# EAGLE board pcb_board (EAGLE 9.7.0)
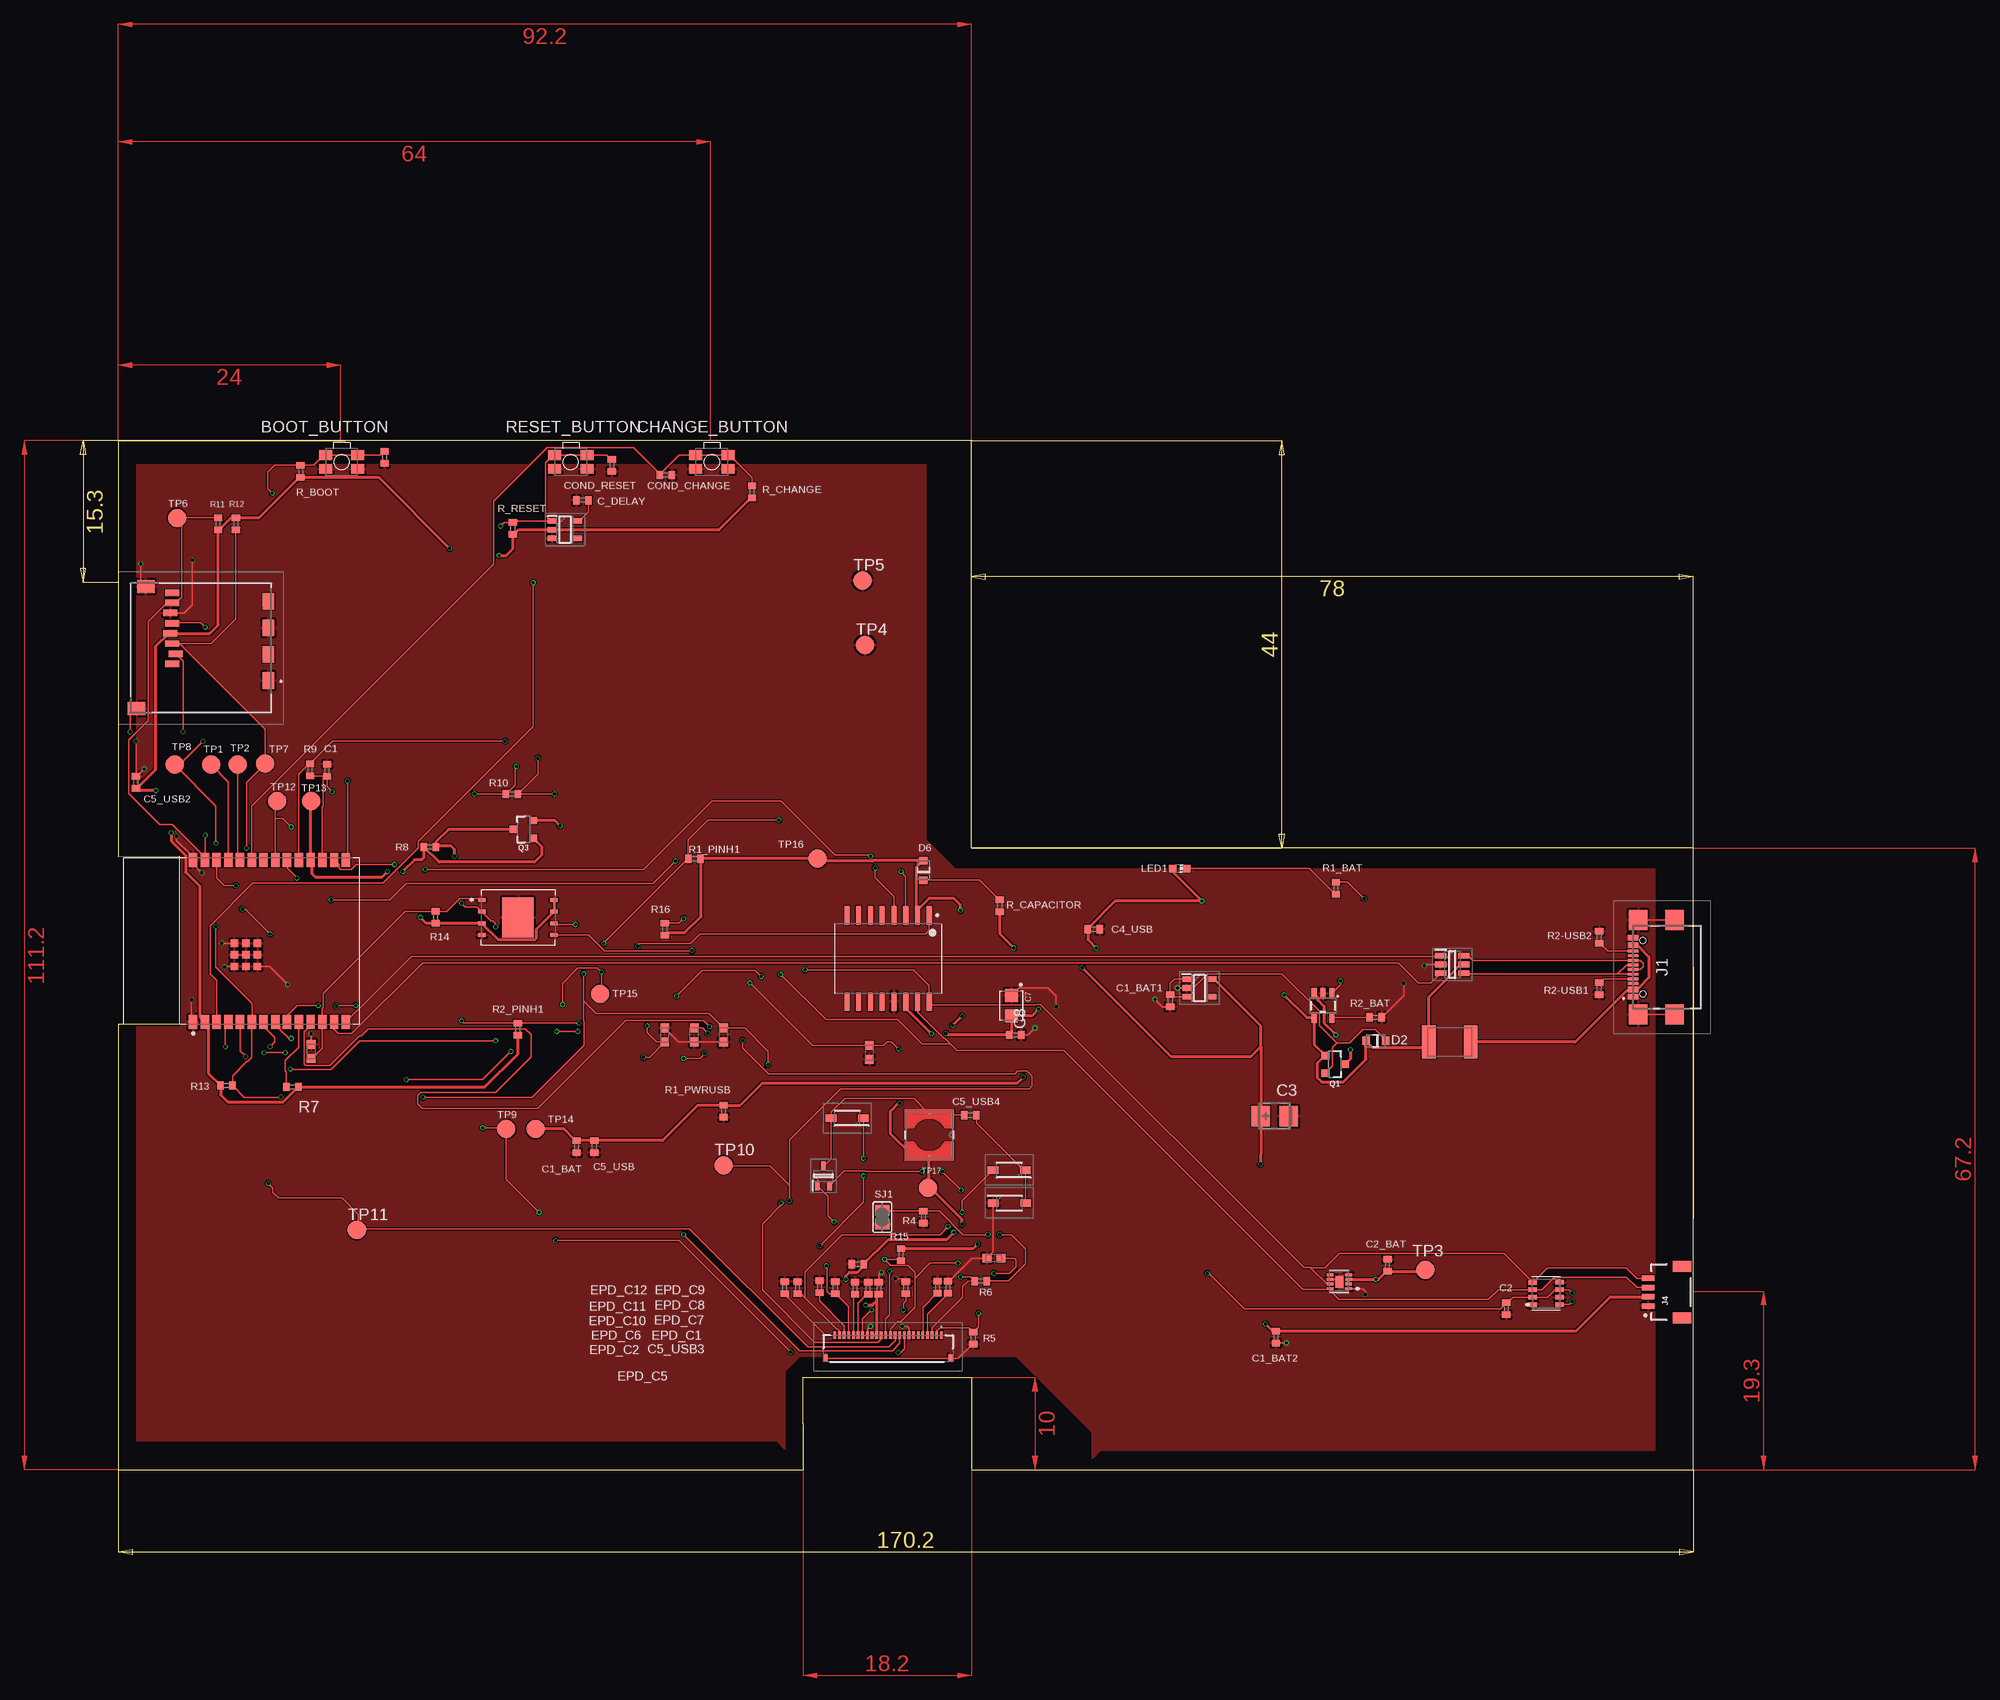
[diagram p0: board, top side]
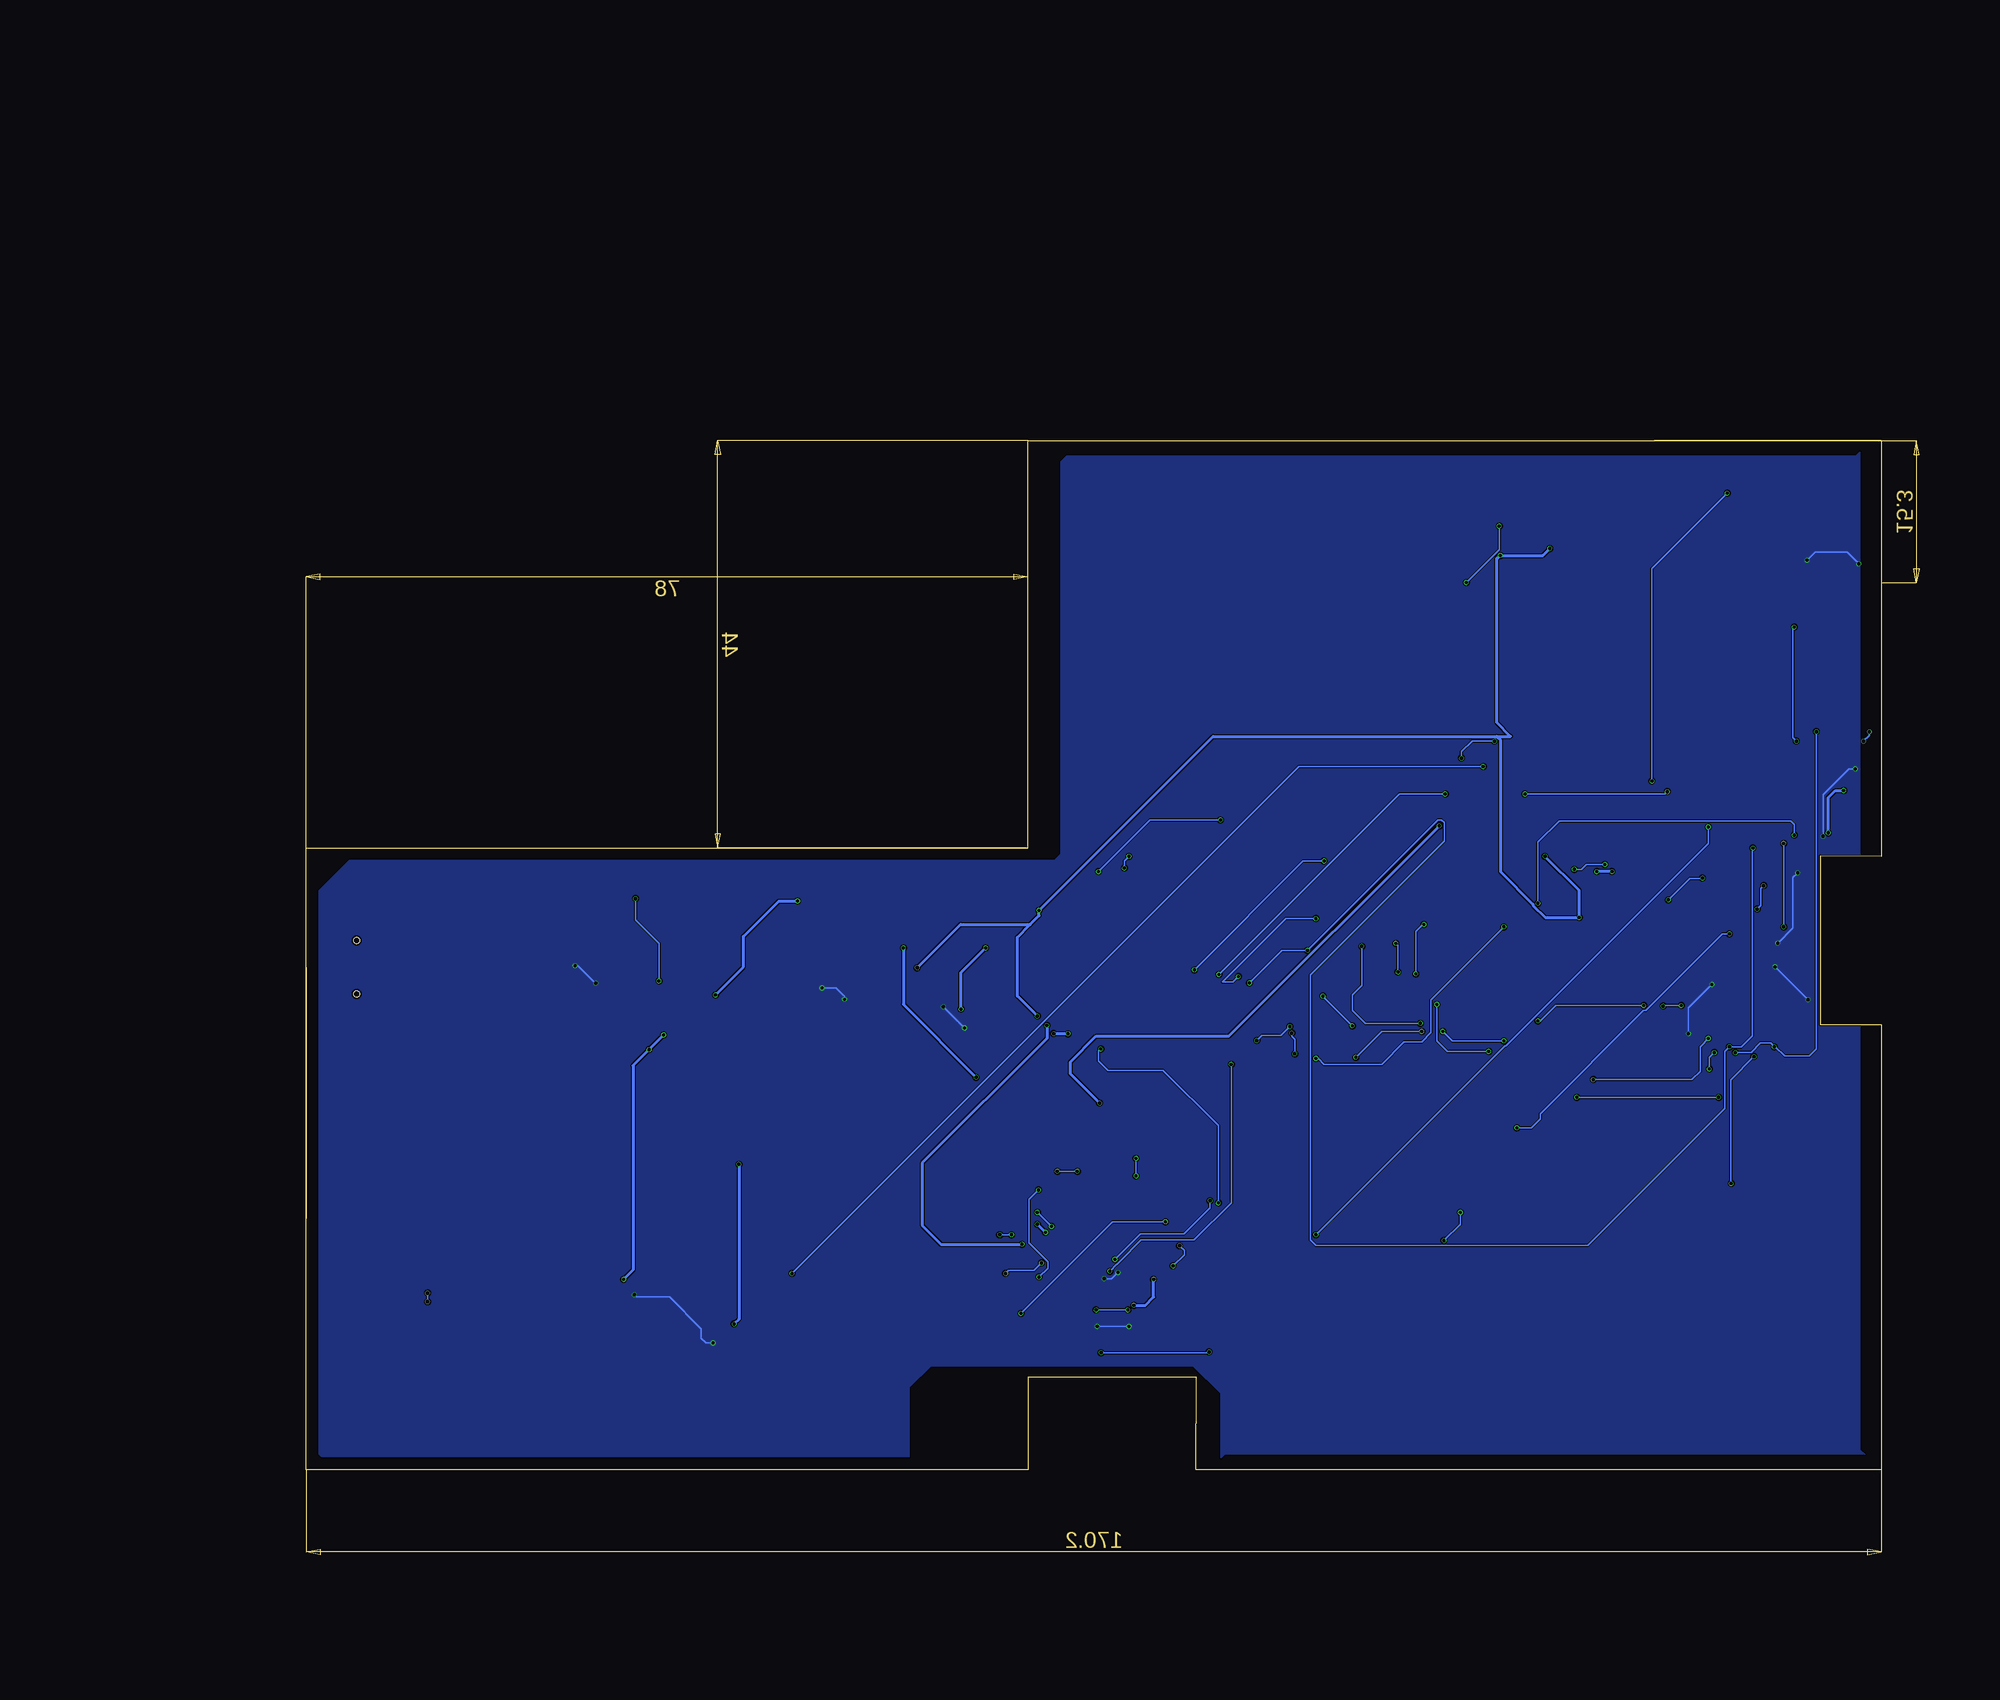
[diagram p1: board, bottom side, seen from below]

Size 170.2 x 111.2 mm. Coordinates in mm from the lower left corner, seen from the top.
Outline: 0,0 74.04,0 74,10 92.2,10 92.2,0 170.2,0 170.2,67.2 92.2,67.2 92.2,111.2 0,111.2 0,66.29 6.59,66.31 6.59,48.15 0,48.13 0,0
Copper layers (1*16): Top 0.035mm / dielectric 1.6mm / Bottom 0.035mm
Design rules "jlcpcb-2layers.dru *": minimum track width 5mil, minimum drill 0.3mm, track to track 5mil, track to pad 5mil, pad to pad 5mil, via to via 5mil, smd to smd 5mil, copper to edge 0.2mm, drill to drill 6mil, minimum pad ring 10mil, minimum via ring 3mil, stop-mask expansion 4mil, vias tented up to drill 0mil, thermal gap 10mil

## Footprints (pad centres in the part's own frame; a part is rotated, then mirrored left to right if it is on the bottom)
MYBUTTON = smd 1.4 x 1.05: 1 1.75,0.75; 2 -1.75,0.75; 3 -1.75,-0.75; 4 1.75,-0.75
ESP32_WROVER_EAGLE-LTSPICE_C0402 = smd 0.7 x 0.9: 1 -0.65,0; 2 0.65,0
RCL_CT3528 = smd 2 x 2.2: + -1.5,0; - 1.5,0
CAPCP3225X100N = smd 1.4 x 1.4: 1 -1.1,0; 2 1.1,0
SOT95P280X145-6N = smd 1.2 x 0.6: 1 -1.25,0.95; 2 -1.25,0; 3 -1.25,-0.95; 4 1.25,-0.95; 5 1.25,0; 6 1.25,0.95
ESP32_WROVER_AVX---SD0805S020S1R0_AVX_SD0805S020S1R0_0 = smd 0.8 x 0.9: 1 -1.05,0; 2 1.05,0
SOD3716X135N = smd 1.15 x 0.8: 1 -1.75,0; 2 1.75,0
DIOC1608X36N = smd 0.97 x 0.94: 1 -0.75,0; 2 0.75,0
SOT95P280X120-5N = smd 0.9 x 0.6: 1 -1.4,0.95; 2 -1.4,0; 3 -1.4,-0.95; 4 1.4,-0.95; 5 1.4,0.95
SOT95P280X125-5N = smd 0.9 x 0.6: 1 -1.4,0.95; 2 -1.4,0; 3 -1.4,-0.95; 4 1.4,-0.95; 5 1.4,0.95
SAMACSYS_PARTS_USB4110GFA = smd 0.3 x 1.15: A1 -3.35,3.678; A4 -2.55,3.678; A5 -1.25,3.678; A6 -0.25,3.678; A7 0.25,3.678; A8 1.25,3.678; A9 2.55,3.678; A12 3.35,3.678; B1 3.05,3.678; B4 2.25,3.678; B5 1.75,3.678; B6 0.75,3.678; B7 -0.75,3.678; B8 -1.75,3.678; B9 -2.25,3.678; B12 -3.05,3.678 | smd 2.18 x 2: MP1 -5.11,-0.827; MP2 5.11,-0.827; MP3 -5.11,3.103; MP4 5.11,3.103 | hole 0.65: -2.89,2.603; 2.89,2.603
112ATAARR03ATTEND = smd 1.8 x 1.2: G1 10.6,10.4; G2 4.9,10.4; S1 7.75,10.4; S2 2.05,10.4 | smd 1.4 x 1.9: G3 13.6,-3.85; G4 0.45,-2.85 | smd 0.7 x 1.5: P1 8.8,0; P2 7.7,0.4; P3 6.6,0; P4 5.5,-0.2; P5 4.4,0; P6 3.3,-0.2; P7 2.2,0; P8 1.1,0
FH34SRJ24S05SH99 = smd 0.3 x 0.8: 1 5.75,1.45; 2 5.25,1.45; 3 4.75,1.45; 4 4.25,1.45; 5 3.75,1.45; 6 3.25,1.45; 7 2.75,1.45; 8 2.25,1.45; 9 1.75,1.45; 10 1.25,1.45; 11 0.75,1.45; 12 0.25,1.45; 13 -0.25,1.45; 14 -0.75,1.45; 15 -1.25,1.45; 16 -1.75,1.45; 17 -2.25,1.45; 18 -2.75,1.45; 19 -3.25,1.45; 20 -3.75,1.45; 21 -4.25,1.45; 22 -4.75,1.45; 23 -5.25,1.45; 24 -5.75,1.45 | smd 0.4 x 0.8: MP1 6.75,-1.05; MP2 -6.75,-1.05
JST04_1MM_RA = smd 0.6 x 1.35: 1 -1.5,0; 2 -0.5,0; 3 0.5,0; 4 1.5,0 | smd 1.2 x 2: NC1 2.8,-3.675; NC2 -2.8,-3.675
IND_4828-WE-TPC_WRE = smd 0.127 x 0.127: 1 -2.286,0; 2 2.286,0
ADAFRUIT_CHIP-LED0603 = smd 0.8 x 0.8: A 0,-0.75; C 0,0.75
ESP32C6_VARISTOR_CT/CN1812 = smd 1.5 x 3.6: 1 -2.25,0; 2 2.25,0
ESP32_WROVER_SPARKFUN-DISCRETESEMI_SOT23-3 = smd 0.8 x 0.9: 1 -0.95,-1; 2 0.95,-1; 3 0,1.1
SOT65P210X110-3N = smd 1.05 x 0.5: 1 -1.05,0.65; 2 -1.05,-0.65; 3 1.05,0
ESP32_WROVER_EAGLE-LTSPICE_R0402 = smd 0.7 x 0.9: 1 -0.65,0; 2 0.65,0
SJ = smd 1.168 x 1.6: 1 -0.762,0; 2 0.762,0
TP20R = smd 2 x 2: TP 0,0
ESP32_WROVER_SPARKFUN-IC-POWER_SOT23-5 = smd 0.55 x 1.2: 1 -0.95,-1.3; 2 0,-1.3; 3 0.95,-1.3; 4 0.95,1.3; 5 -0.95,1.3
XCVR_ESP32-C6-WROOM-1-N8 = smd 1.5 x 0.9: 1 -8.75,5.26; 2 -8.75,3.99; 3 -8.75,2.72; 4 -8.75,1.45; 5 -8.75,0.18; 6 -8.75,-1.09; 7 -8.75,-2.36; 8 -8.75,-3.63; 9 -8.75,-4.9; 10 -8.75,-6.17; 11 -8.75,-7.44; 12 -8.75,-8.71; 13 -8.75,-9.98; 14 -8.75,-11.25; 15 8.75,-11.25; 16 8.75,-9.98; 17 8.75,-8.71; 18 8.75,-7.44; 19 8.75,-6.17; 20 8.75,-4.9; 21 8.75,-3.63; 22 8.75,-2.36; 23 8.75,-1.09; 24 8.75,0.18; 25 8.75,1.45; 26 8.75,2.72; 27 8.75,3.99; 28 8.75,5.26 | smd 0.8 x 0.8: 29_1 -2.755,0.79; 29_2 -1.505,0.79; 29_3 -0.255,0.79; 29_4 -2.755,-0.46; 29_5 -1.505,-0.46; 29_6 -0.255,-0.46; 29_7 -2.755,-1.71; 29_8 -1.505,-1.71; 29_9 -0.255,-1.71
ESP32_WROVER_BME680_PSON80P300X300X100-8N = smd 1.016 x 0.5: 1 1.458,1.2; 2 1.458,0.4; 3 1.458,-0.4; 4 1.458,-1.2; 5 -1.458,-1.22; 6 -1.458,-0.4; 7 -1.458,0.4; 8 -1.458,1.2
SON50P200X200X80-9N = smd 0.76 x 0.27: 1 -0.985,0.75; 2 -0.985,0.25; 3 -0.985,-0.25; 4 -0.985,-0.75; 5 0.985,-0.75; 6 0.985,-0.25; 7 0.985,0.25; 8 0.985,0.75 | smd 0.9 x 1.3: 9 0,0
SOIC127P1032X265-16N = smd 2.05 x 0.59: 1 -4.655,4.445; 2 -4.655,3.175; 3 -4.655,1.905; 4 -4.655,0.635; 5 -4.655,-0.635; 6 -4.655,-1.905; 7 -4.655,-3.175; 8 -4.655,-4.445; 9 4.655,-4.445; 10 4.655,-3.175; 11 4.655,-1.905; 12 4.655,-0.635; 13 4.655,0.635; 14 4.655,1.905; 15 4.655,3.175; 16 4.655,4.445
SON127P600X800X80-9N = smd 0.94 x 0.44: 1 -3.895,1.905; 2 -3.895,0.635; 3 -3.895,-0.635; 4 -3.895,-1.905; 5 3.895,-1.905; 6 3.895,-0.635; 7 3.895,0.635; 8 3.895,1.905 | smd 3.4 x 4.3: 9 0,0

## Placement (x,y rotation side)
BOOT_BUTTON  BUTTON_CUSYOMV1  [MYBUTTON]  24.13,108.91 180 top
C1  100nF  [ESP32_WROVER_EAGLE-LTSPICE_C0402]  22.57,75.6 90 top
C1_BAT  4.7uF  [ESP32_WROVER_EAGLE-LTSPICE_C0402]  49.53,34.91 270 top
C1_BAT1  4.7uF  [ESP32_WROVER_EAGLE-LTSPICE_C0402]  113.67,50.67 270 top
C1_BAT2  4.7uF  [ESP32_WROVER_EAGLE-LTSPICE_C0402]  125.09,14.35 270 top
C2  100nF  [ESP32_WROVER_EAGLE-LTSPICE_C0402]  149.99,17.4 270 top
C2_BAT  4.7uF  [ESP32_WROVER_EAGLE-LTSPICE_C0402]  137.16,22.1 90 top
C3  100uF TANT  [RCL_CT3528]  124.97,38.23 0 top
C4_USB  100nF  [ESP32_WROVER_EAGLE-LTSPICE_C0402]  105.41,58.42 0 top
C5_USB  4.7uF  [ESP32_WROVER_EAGLE-LTSPICE_C0402]  51.44,34.92 270 top
C5_USB2  100nF  [ESP32_WROVER_EAGLE-LTSPICE_C0402]  1.91,74.3 90 top
C5_USB3  4.7uF  [ESP32_WROVER_EAGLE-LTSPICE_C0402]  82.19,19.65 90 top
C5_USB4  4.7uF  [ESP32_WROVER_EAGLE-LTSPICE_C0402]  92.08,38.33 180 top
C7  CPH3225A  [CAPCP3225X100N]  96.52,50.16 270 top
C8  100nF  [ESP32_WROVER_EAGLE-LTSPICE_C0402]  96.9,46.99 0 top
C_DELAY  100nF  [ESP32_WROVER_EAGLE-LTSPICE_C0402]  50.16,104.78 180 top
CHANGE_BUTTON  CHANGE_BUTTON  [MYBUTTON]  64.14,108.91 180 top
COND_BOOT  100nF  [ESP32_WROVER_EAGLE-LTSPICE_C0402]  28.79,109.39 270 top
COND_CHANGE  100nF  [ESP32_WROVER_EAGLE-LTSPICE_C0402]  59.18,107.5 0 top
COND_RESET  1uF  [ESP32_WROVER_EAGLE-LTSPICE_C0402]  53.34,108.55 270 top
D1  USBLC6-2SC6Y  [SOT95P280X145-6N]  144.15,54.61 0 top
D2  SD0805S020S1R0  [ESP32_WROVER_AVX---SD0805S020S1R0_AVX_SD0805S020S1R0_0]  135.89,46.35 180 top
D3  MBR0530  [SOD3716X135N]  96.27,32.38 180 top
D4  MBR0530  [SOD3716X135N]  96.29,28.83 0 top
D5  MBR0530  [SOD3716X135N]  78.77,38 180 top
D6  ESP32_WROVER_AVX---SD0805S020S1R0_AVX_SD0805S020S1R0_0_0AVX_SD0805S020S1R0_0_0  [ESP32_WROVER_AVX---SD0805S020S1R0_AVX_SD0805S020S1R0_0]  87,64.77 90 top
D7  PGB1010603MR  [DIOC1608X36N]  62.23,46.99 90 top
D8  PGB1010603MR  [DIOC1608X36N]  81.15,45.09 90 top
D9  PGB1010603MR  [DIOC1608X36N]  65.41,46.99 90 top
D10  PGB1010603MR  [DIOC1608X36N]  20.83,45.21 270 top
D11  PGB1010603MR  [DIOC1608X36N]  94.61,22.86 0 top
D12  PGB1010603MR  [DIOC1608X36N]  59.05,46.99 270 top
EPD_C1  1uF/50V  [ESP32_WROVER_EAGLE-LTSPICE_C0402]  89.66,19.72 90 top
EPD_C2  1uF/50V  [ESP32_WROVER_EAGLE-LTSPICE_C0402]  88.53,19.72 90 top
EPD_C5  0.1uF/50V  [ESP32_WROVER_EAGLE-LTSPICE_C0402]  79.89,22.23 180 top
EPD_C6  1uF/50V  [ESP32_WROVER_EAGLE-LTSPICE_C0402]  85.09,19.68 90 top
EPD_C7  1uF/50V  [ESP32_WROVER_EAGLE-LTSPICE_C0402]  81.03,19.63 90 top
EPD_C8  1uF/50V  [ESP32_WROVER_EAGLE-LTSPICE_C0402]  79.6,19.63 90 top
EPD_C9  1uF/50V  [ESP32_WROVER_EAGLE-LTSPICE_C0402]  77.47,19.68 90 top
EPD_C10  1uF/50V  [ESP32_WROVER_EAGLE-LTSPICE_C0402]  75.77,19.81 90 top
EPD_C11  1uF/50V  [ESP32_WROVER_EAGLE-LTSPICE_C0402]  73.41,19.68 90 top
EPD_C12  1uF/50V  [ESP32_WROVER_EAGLE-LTSPICE_C0402]  72.01,19.68 90 top
IC1  XC6220A331MR-G  [SOT95P280X120-5N]  116.84,52.07 0 top
IC3  BD5229G-TR  [SOT95P280X125-5N]  48.26,101.6 0 top
J1  SAMACSYS_PARTS_USB4110-GF-A  [SAMACSYS_PARTS_USB4110GFA]  167.36,54.31 90 top
J2  112A-TAAR-R03_ATTEND  [112ATAARR03ATTEND]  5.82,95.89 270 top
J3  FH34SRJ-24S-0.5SH_99_  [FH34SRJ24S05SH99]  83.19,13.1 0 top
J4  QWIIC_RIGHT_ANGLE  [JST04_1MM_RA]  165.32,19.2 90 top
L1  68uH  [IND_4828-WE-TPC_WRE]  87.63,36.2 270 top
LED1  [ADAFRUIT_CHIP-LED0603]  114.71,64.97 270 top
PFMF.050.1  ESP32C6_VARISTORCN1812  [ESP32C6_VARISTOR_CT/CN1812]  143.89,46.23 180 top
Q1  20V/4.2A/52mΩ/1.4W  [ESP32_WROVER_SPARKFUN-DISCRETESEMI_SOT23-3]  131.44,43.81 270 top
Q2  SI1308EDL-T1-GE3  [SOT65P210X110-3N]  76.2,31.75 90 top
Q3  20V/4.2A/52mΩ/1.4W  [ESP32_WROVER_SPARKFUN-DISCRETESEMI_SOT23-3]  43.81,69.22 90 top
R1_BAT  200  [ESP32_WROVER_EAGLE-LTSPICE_R0402]  131.57,62.87 90 top
R1_PINH1  10K  [ESP32_WROVER_EAGLE-LTSPICE_R0402]  62.23,66.04 0 top
R1_PWRUSB  100k  [ESP32_WROVER_EAGLE-LTSPICE_R0402]  65.41,38.73 90 top
R2-USB1  5k1  [ESP32_WROVER_EAGLE-LTSPICE_R0402]  160.02,51.99 90 top
R2-USB2  5k1  [ESP32_WROVER_EAGLE-LTSPICE_R0402]  160.02,57.53 90 top
R2_BAT  2k  [ESP32_WROVER_EAGLE-LTSPICE_R0402]  135.89,48.9 180 top
R2_PINH1  10K  [ESP32_WROVER_EAGLE-LTSPICE_R0402]  43.18,47.62 270 top
R4  2.2  [ESP32_WROVER_EAGLE-LTSPICE_R0402]  87,27.3 270 top
R5  10K  [ESP32_WROVER_EAGLE-LTSPICE_R0402]  92.38,14.22 90 top
R6  0.47  [ESP32_WROVER_EAGLE-LTSPICE_R0402]  93.19,20.4 180 top
R7  10k  [ESP32_WROVER_EAGLE-LTSPICE_R0402]  18.79,41.38 0 top
R8  10K  [ESP32_WROVER_EAGLE-LTSPICE_R0402]  33.66,67.31 0 top
R9  10K  [ESP32_WROVER_EAGLE-LTSPICE_R0402]  20.73,75.66 270 top
R10  10K  [ESP32_WROVER_EAGLE-LTSPICE_R0402]  42.55,73.03 180 top
R11  10K  [ESP32_WROVER_EAGLE-LTSPICE_R0402]  10.79,102.23 270 top
R12  10K  [ESP32_WROVER_EAGLE-LTSPICE_R0402]  12.7,102.23 90 top
R13  10K  [ESP32_WROVER_EAGLE-LTSPICE_R0402]  11.68,41.53 180 top
R14  10K  [ESP32_WROVER_EAGLE-LTSPICE_R0402]  34.29,59.69 270 top
R15  10K  [ESP32_WROVER_EAGLE-LTSPICE_R0402]  84.58,23.24 90 top
R16  10K  [ESP32_WROVER_EAGLE-LTSPICE_R0402]  59.05,58.42 270 top
R_BOOT  10K  [ESP32_WROVER_EAGLE-LTSPICE_R0402]  19.68,107.91 270 top
R_CAPACITOR  15  [ESP32_WROVER_EAGLE-LTSPICE_R0402]  95.25,60.96 90 top
R_CHANGE  10K  [ESP32_WROVER_EAGLE-LTSPICE_R0402]  68.48,105.7 270 top
R_RESET  10K  [ESP32_WROVER_EAGLE-LTSPICE_R0402]  42.64,101.73 270 top
RESET_BUTTON  BUTTON_CUSYOMV1  [MYBUTTON]  48.9,108.91 180 top
SJ1  [SJ]  82.55,27.3 90 top
TP1  TPTP20R  [TP20R]  10.03,76.2 0 top
TP2  TPTP20R  [TP20R]  12.92,76.2 0 top
TP3  TPTP20R  [TP20R]  141.22,21.59 0 top
TP4  TPTP20R  [TP20R]  80.69,89.14 0 top
TP5  TPTP20R  [TP20R]  80.42,96.1 0 top
TP6  TPTP20R  [TP20R]  6.35,102.87 0 top
TP7  TPTP20R  [TP20R]  15.84,76.34 0 top
TP8  TPTP20R  [TP20R]  6.1,76.2 0 top
TP9  TPTP20R  [TP20R]  41.91,36.83 0 top
TP10  TPTP20R  [TP20R]  65.41,32.91 0 top
TP11  TPTP20R  [TP20R]  25.78,25.91 0 top
TP12  TPTP20R  [TP20R]  17.14,72.26 0 top
TP13  TPTP20R  [TP20R]  20.85,72.26 0 top
TP14  TPTP20R  [TP20R]  45.09,36.83 0 top
TP15  TPTP20R  [TP20R]  52.07,51.44 0 top
TP16  TPTP20R  [TP20R]  75.56,66.04 0 top
TP17  TPTP20R  [TP20R]  87.5,30.48 0 top
U1  MCP73831  [ESP32_WROVER_SPARKFUN-IC-POWER_SOT23-5]  130.18,50.16 180 top
U2  ESP32-C6-WROOM-1-N8  [XCVR_ESP32-C6-WROOM-1-N8]  13.34,57.15 90 top
U3  BME688  [ESP32_WROVER_BME680_PSON80P300X300X100-8N]  154.31,19.05 180 top
U4  MAX17048G+T10  [SON50P200X200X80-9N]  131.95,20.32 180 top
U5  DS3231SN#  [SOIC127P1032X265-16N]  83.19,55.24 270 top
U6  W25Q512JVEIQ  [SON127P600X800X80-9N]  43.18,59.69 0 top

## Library data of the parts
BOOT_BUTTON CHANGE_BUTTON IC1 J4 LED1 PFMF.050.1 RESET_BUTTON SJ1 TP1-TP17 = DeskAssistant_v19_v1
C1 C1_BAT C1_BAT1 C1_BAT2 C2 C2_BAT C4_USB C5_USB C5_USB2-C5_USB4 C8 C_DELAY COND_BOOT COND_CHANGE COND_RESET EPD_C1 EPD_C2 EPD_C5-EPD_C12 = DeskAssistant_v19_v1; SPICEMODEL: NONE; SPICEPREFIX: C
C3 = DeskAssistant_v19_v1; SPICEPREFIX: C
C7 = DeskAssistant_v19_v1; AVAILABILITY: Not in stock; CHECK_PRICES: https://www.snapeda.com/parts/CPH3225A/Seiko+Instruments/view-part/?ref=eda; DESCRIPTION: 11 mF (EDLC) Supercapacitor 3.3 V 1210 (3225 Metric) - -; MF: Seiko Instruments; MP: CPH3225A; PACKAGE: 1210 Seiko; PRICE: None; PURCHASE-URL: https://www.snapeda.com/api/url_track_click_mouser/?unipart_id=562593&manufacturer=Seiko Instruments&part_name=CPH3225A&search_term=None; SNAPEDA_LINK: https://www.snapeda.com/parts/CPH3225A/Seiko+Instruments/view-part/?ref=snap
D1 = DeskAssistant_v19_v1; AVAILABILITY: In Stock; CHECK_PRICES: https://www.snapeda.com/parts/USBLC6-2SC6Y/STMicroelectronics/view-part/?ref=eda; DESCRIPTION: 17V Clamp 5A (8/20µs) Ipp Tvs Diode Surface Mount SOT-23-6; MF: STMicroelectronics; MP: USBLC6-2SC6Y; PACKAGE: SOT-23-6 STMicroelectronics; PRICE: None; SNAPEDA_LINK: https://www.snapeda.com/parts/USBLC6-2SC6Y/STMicroelectronics/view-part/?ref=snap
D2 D6 = DeskAssistant_v19_v1; CENTROID_NOT_SPECIFIED: No; DATASHEET: http://datasheets.avx.com/schottky.pdf; DIGIKEY_DESCRIPTION: DIODE SCHOTTKY 20V 1A 0805; DIGIKEY_PART_NUMBER: 478-7800-1-ND; LEAD_FREE: yes; MF: AVX; MOUSER_PART_NUMBER: 581-SD0805S020S1R0; PACKAGE: 0805 (2012 metric); PREFIX: D; ROHS: yes; TEMPERATURE_RANGE_HIGH: +125°C; TEMPERATURE_RANGE_LOW: -55°C
D3-D5 = DeskAssistant_v19_v1; AVAILABILITY: In Stock; CHECK_PRICES: https://www.snapeda.com/parts/MBR0530/Onsemi/view-part/?ref=eda; DESCRIPTION: Diode Schottky 30 V 500mA Surface Mount SOD-123; MF: ON Semiconductor; MP: MBR0530; PACKAGE: SOD-123-2 ON Semiconductor; PRICE: None; PURCHASE-URL: https://www.snapeda.com/api/url_track_click_mouser/?unipart_id=179458&manufacturer=ON Semiconductor&part_name=MBR0530&search_term=None; SNAPEDA_LINK: https://www.snapeda.com/parts/MBR0530/Onsemi/view-part/?ref=snap
D7-D12 = DeskAssistant_v19_v1; AVAILABILITY: In Stock; CHECK_PRICES: https://www.snapeda.com/parts/PGB1010603MR/Littelfuse/view-part/?ref=eda; DESCRIPTION: 150V (Typ) Clamp - Ipp Tvs Diode Surface Mount 0603 (1608 Metric); MF: Littelfuse Inc.; MP: PGB1010603MR; PACKAGE: 0603 Littelfuse Inc.; PRICE: None; PURCHASE-URL: https://www.snapeda.com/api/url_track_click_mouser/?unipart_id=5659453&manufacturer=Littelfuse Inc.&part_name=PGB1010603MR&search_term=None; SNAPEDA_LINK: https://www.snapeda.com/parts/PGB1010603MR/Littelfuse/view-part/?ref=snap
IC3 = DeskAssistant_v19_v1; DESCRIPTION: Voltage Detector with Adjustable Delay Time: CMOS processes are utilized to develop high precision, low current consumption CMOS reset ICs that allow arbitrary setting of the delay time. The extensive lineup includes both Nch Open Drain and CMOS output types in a wide range of detection voltages (from 2.3V to 6.0V, in 0.1V steps), enabling selection of the ideal solution based on customer requirements. In addition, the entire series is of course both lead-free and RoHS-compliant.; HEIGHT: 1.25mm; MANUFACTURER_NAME: ROHM Semiconductor; MANUFACTURER_PART_NUMBER: BD5229G-TR; MOUSER_PART_NUMBER: 755-BD5229G-TR; MOUSER_PRICE-STOCK: https://www.mouser.co.uk/ProductDetail/ROHM-Semiconductor/BD5229G-TR?qs=4kLU8WoGk0vvnhrrYwdszw%3D%3D
J1 = DeskAssistant_v19_v1; DESCRIPTION: CONN USB 2.0 TYPE-C R/A SMT; HEIGHT: 3.26mm; MANUFACTURER_NAME: GCT (GLOBAL CONNECTOR TECHNOLOGY); MANUFACTURER_PART_NUMBER: USB4110-GF-A; MOUSER_PART_NUMBER: 640-USB4110-GF-A; MOUSER_PRICE-STOCK: https://www.mouser.co.uk/ProductDetail/GCT/USB4110-GF-A?qs=KUoIvG%2F9IlYiZvIXQjyJeA%3D%3D
J2 = DeskAssistant_v19_v1; DESCRIPTION: Micro SD Card Socket, Push-Push Type, Top Mount, SMT, H=1.83mm, 10u; HEIGHT: 1.9mm; MANUFACTURER_NAME: ATTEND; MANUFACTURER_PART_NUMBER: 112A-TAAR-R03 ATTEND
J3 = DeskAssistant_v19_v1; DESCRIPTION: 24 Position FFC, FPC Connector Contacts, Top and Bottom 0.020" (0.50mm) Surface Mount, Right Angle; HEIGHT: 1.1mm; MANUFACTURER_NAME: Hirose; MANUFACTURER_PART_NUMBER: FH34SRJ-24S-0.5SH(99); MOUSER_PART_NUMBER: 798-FH34SRJ24S05SH99; MOUSER_PRICE-STOCK: https://www.mouser.co.uk/ProductDetail/Hirose-Connector/FH34SRJ-24S-0.5SH99?qs=vcbW%252B4%252BSTIpKBl5ap9J8Fw%3D%3D
L1 = DeskAssistant_v19_v1; COPYRIGHT: Copyright (C) 2024 Ultra Librarian. All rights reserved.; MANUFACTURER_PART_NUMBER: 744043680; MFR_NAME: Wurth Electronics
Q1 Q3 = DeskAssistant_v19_v1; PROD_ID: TRAN-14388
Q2 = DeskAssistant_v19_v1; AVAILABILITY: In Stock; CHECK_PRICES: https://www.snapeda.com/parts/SI1308EDL-T1-GE3/Vishay+Siliconix/view-part/?ref=eda; DESCRIPTION: Si1308EDL-T1-GE3 N-channel MOSFET Transistor, 1.5 A, 30 V, 3-Pin SC-70 | Siliconix / Vishay SI1308EDL-T1-GE3; MF: Vishay Siliconix; MP: SI1308EDL-T1-GE3; PACKAGE: SOT-323 Vishay Semiconductor; PRICE: None; PURCHASE-URL: https://www.snapeda.com/api/url_track_click_mouser/?unipart_id=274603&manufacturer=Vishay Siliconix&part_name=SI1308EDL-T1-GE3&search_term=None; SNAPEDA_LINK: https://www.snapeda.com/parts/SI1308EDL-T1-GE3/Vishay+Siliconix/view-part/?ref=snap
R1_BAT R1_PINH1 R1_PWRUSB R2-USB1 R2-USB2 R2_BAT R2_PINH1 R4-R16 R_BOOT R_CAPACITOR R_CHANGE R_RESET = DeskAssistant_v19_v1; SPICEMODEL: NONE; SPICEPREFIX: R
U1 = DeskAssistant_v19_v1; PROD_ID: IC-09995
U2 = DeskAssistant_v19_v1; AVAILABILITY: In Stock; CHECK_PRICES: https://www.snapeda.com/parts/ESP32-C6-WROOM-1-N8/Espressif+Systems/view-part/?ref=eda; DESCRIPTION: Multiprotocol Modules ESP32-C6 module, Wi-Fi 6 in 2.4 GHz band, Bluetooth 5, Zigbee 3.0 and Thread. ESP34-WROOM Compatible - ENGINEERING SAMPLE; MF: Espressif Systems; MP: ESP32-C6-WROOM-1-N8; PACKAGE: None; PRICE: None; SNAPEDA_LINK: https://www.snapeda.com/parts/ESP32-C6-WROOM-1-N8/Espressif+Systems/view-part/?ref=snap
U3 = DeskAssistant_v19_v1; AVAILABILITY: Unavailable; DESCRIPTION: Integrated Environmental Unit; MF: Bosch Sensortec; MP: BME680; PACKAGE: LGA-8 Bosch Tools; PRICE: None
U4 = DeskAssistant_v19_v1; AVAILABILITY: In Stock; CHECK_PRICES: https://www.snapeda.com/parts/MAX17048G+T10/Analog+Devices/view-part/?ref=eda; DESCRIPTION: 3µA 1-Cell/2-Cell Fuel Gauge with ModelGauge; MF: Analog Devices; MP: MAX17048G+T10; PACKAGE: TDFN-8 Maxim; PRICE: None; PURCHASE-URL: https://www.snapeda.com/api/url_track_click_mouser/?unipart_id=329239&manufacturer=Analog Devices&part_name=MAX17048G+T10&search_term=None; SNAPEDA_LINK: https://www.snapeda.com/parts/MAX17048G+T10/Analog+Devices/view-part/?ref=snap
U5 = DeskAssistant_v19_v1; AVAILABILITY: In Stock; CHECK_PRICES: https://www.snapeda.com/parts/DS3231SN%23/Analog+Devices/view-part/?ref=eda; DESCRIPTION: Extremely Accurate I²C-Integrated RTC/TCXO/Crystal; MF: Analog Devices; MP: DS3231SN#; PACKAGE: SOIC-16 Maxim; PRICE: None; PURCHASE-URL: https://www.snapeda.com/api/url_track_click_mouser/?unipart_id=99048&manufacturer=Analog Devices&part_name=DS3231SN#&search_term=None; SNAPEDA_LINK: https://www.snapeda.com/parts/DS3231SN%23/Analog+Devices/view-part/?ref=snap
U6 = DeskAssistant_v19_v1; AVAILABILITY: In Stock; CHECK_PRICES: https://www.snapeda.com/parts/W25Q512JVEIQ/Winbond+Electronics/view-part/?ref=eda; DESCRIPTION: FLASH - NOR Memory IC 512Mb (64M x 8) SPI - Quad I/O 133 MHz 8-WSON (8x6); MF: Winbond Electronics; MP: W25Q512JVEIQ; PACKAGE: Package; PRICE: None; SNAPEDA_LINK: https://www.snapeda.com/parts/W25Q512JVEIQ/Winbond+Electronics/view-part/?ref=snap

## Nets
3V3 [power]: C1_BAT2.1 C3.+ C5_USB2.1 D6.2 IC1.5 IC3.2 J2.P4 J4.2 Q3.3 R1_PINH1.2 R2_PINH1.2 R7.2 R8.2 R11.2 R12.2 R13.2 R14.2 R15.2 R16.2 R_BOOT.2 R_CHANGE.2 R_RESET.2 TP16.TP U2.2 U5.2 U6.3 U6.7 U6.8
32KHZ: R2_PINH1.1 U2.9 U5.1
DN: D1.4 J1.A7 J1.B7
DP: D1.6 J1.A6 J1.B6
EPD_3V3 [power]: C5_USB3.1 EPD_C5.1 J3.15 J3.16 L1.2 Q3.2 TP17.TP
EPD_3V3_C [power]: Q3.1 R8.1 TP13.TP U2.18
EPD_BUSY: J3.9 TP9.TP U2.26
EPD_CS: D11.2 J3.12 R15.1 TP10.TP U2.11
EPD_DC: J3.11 TP11.TP U2.5
EPD_RST: J3.10 TP12.TP U2.21
FLASH_CS: D10.2 R14.1 U2.12 U6.1
GDR: J3.2 Q2.1 R5.2
GND: BOOT_BUTTON.1 BOOT_BUTTON.2 C1.2 C1_BAT1.2 C1_BAT2.2 C1_BAT.2 C2.2 C2_BAT.2 C3.- C4_USB.2 C5_USB2.2 C5_USB3.2 C5_USB.2 C7.1 C8.2 C_DELAY.2 CHANGE_BUTTON.1 CHANGE_BUTTON.2 COND_BOOT.2 COND_CHANGE.2 COND_RESET.2 D1.2 D4.1 D7.1 D8.1 D9.1 D10.1 D11.1 D12.1 EPD_C1.2 EPD_C2.2 EPD_C5.2 EPD_C6.2 EPD_C7.2 EPD_C8.2 EPD_C9.2 EPD_C10.2 EPD_C11.2 EPD_C12.2 IC1.2 IC3.3 J1.A1 J1.A12 J1.B1 J1.B12 J1.MP1 J1.MP2 J1.MP3 J1.MP4 J2.G1 J2.G2 J2.G3 J2.G4 J2.P6 J3.8 J3.17 J3.MP1 J3.MP2 J4.1 R1_PWRUSB.1 R2-USB1.1 R2-USB2.2 R2_BAT.1 R4.2 R5.1 RESET_BUTTON.1 RESET_BUTTON.2 SJ1.1 TP4.TP TP5.TP U1.2 U2.1 U2.28 U2.29_1 U2.29_2 U2.29_3 U2.29_4 U2.29_5 U2.29_6 U2.29_7 U2.29_8 U2.29_9 U3.1 U3.5 U3.7 U4.1 U4.4 U4.6 U4.9 U5.13 U6.4 U6.9
GPIO8: R7.1 U2.10
I2C_PW: C1.1 C2.1 R9.2 R10.2 U2.17 U3.2 U3.6 U3.8
INT_RTC: R1_PINH1.1 TP15.TP U2.8 U5.3
IO/BOOT: BOOT_BUTTON.3 BOOT_BUTTON.4 COND_BOOT.1 R_BOOT.1 U2.15
IO/CHANGE: CHANGE_BUTTON.3 CHANGE_BUTTON.4 COND_CHANGE.1 R_CHANGE.1 U2.23
MISO: D7.2 J2.P7 R11.1 TP6.TP U2.27 U6.2
MOSI: D8.2 J2.P3 J3.14 R12.1 TP7.TP U2.7 U6.5
N$1: C1_BAT1.1 D2.1 IC1.1 IC1.3 Q1.2
N$2: EPD_C12.1 J3.24
N$3: R1_BAT.2 U1.1
N$4: J1.B5 R2-USB2.1
N$5: J1.A5 R2-USB1.2
N$6: C5_USB4.1 D3.1 D4.2
N$7: LED1.C R1_BAT.1
N$8: R2_BAT.2 U1.5
N$9: D6.1 R_CAPACITOR.2
N$10: EPD_C10.1 J3.22
N$11: C_DELAY.1 IC3.5
N$12: EPD_C7.1 J3.19
N$13: EPD_C8.1 J3.20
N$14: EPD_C6.1 J3.18
N$23: EPD_C2.1 J3.5
N$24: EPD_C1.1 J3.4
PREVGH: D5.1 EPD_C9.1 J3.21
PREVGL: D3.2 EPD_C11.1 J3.23
RESE: J3.3 Q2.2 R6.2
RESE': R4.1 R6.1 SJ1.2
RESET: COND_RESET.1 IC3.1 R_RESET.1 RESET_BUTTON.3 RESET_BUTTON.4 U2.3
RTC_RST: U2.16 U5.4
RX: TP2.TP U2.24
SCK: D9.2 J2.P5 J3.13 R13.1 TP8.TP U2.6 U6.6
SCL: J4.4 U2.20 U3.4 U4.7 U5.16
SDA: J4.3 R9.1 R10.1 U2.19 U3.3 U4.8 U5.15
SRC: C5_USB4.2 D5.2 L1.1 Q2.3
SS_SD: D12.2 J2.P2 R16.1 U2.4
TX: TP1.TP U2.25
USB_D+: D1.1 U2.14
USB_D-: D1.3 U2.13
VBAT [power]: C2_BAT.1 Q1.3 TP3.TP U1.3 U4.2 U4.3
VBUS [power]: C1_BAT.1 C4_USB.1 C5_USB.1 D1.5 D2.2 LED1.A PFMF.050.1.2 Q1.1 R1_PWRUSB.2 TP14.TP U1.4
VRTC [power]: C7.2 C8.1 R_CAPACITOR.1 U5.14
VUSB [power]: J1.A4 J1.A9 J1.B4 J1.B9 PFMF.050.1.1

## Tracks (layer width: path | path; a pad name or v marks a point on that pad's centre or on a via)
3V3  (via drill 0.35)
  Top 0.3: R_CHANGE.2 68.38,105.05 64.93,101.6 IC3.2 43.26,101.6 42.74,101.08 R_RESET.2 42.64,99.53 41.91,98.81 v41.15,98.81 | v35.81,99.57 28.12,107.26 R_BOOT.2 19.59,107.26 15.21,102.89 R12.2 12.2,102.89 10.89,101.58 R11.2 10.79,91.31 9.87,90.39 J2.P4 5.42,90.39 4.03,89 4.03,75.67 2,73.64 C5_USB2.1 2.14,73.41 v4.06,73.41 | IC1.5 118.39,53.02 123.47,47.94 123.47,45.74 | 123.47,45.74 C3.+ 123.47,34.06 123.44,34.04 v123.44,33.02 | v123.95,15.75 124.7,15 C1_BAT2.1 157.56,15 161.26,18.7 J4.2 | v104.17,54.25 104.19,54.25 113.82,44.63 122.35,44.63 123.47,45.74 | v91.01,60.45 91.01,61.04 90.3,61.75 87.61,61.75 86.36,60.5 U5.2 86.27,59.99 86.27,65.14 86.94,65.82 D6.2 81.55,65.82 81.5,65.77 75.84,65.77 TP16.TP 62.99,66.04 | 62.99,66.04 R1_PINH1.2 | v91.19,49.02 v90.17,48.01 | v92.84,24.38 92.34,23.89 R15.2 | R16.2 59.32,58.04 61.21,58.04 62.99,59.82 62.99,66.04 | Q3.3 35.69,69.22 34.3,67.83 34.3,67.44 | 34.3,67.44 R8.2 | v32.64,59.69 33.29,59.04 R14.2 34.3,59.05 U6.3 41.08,57.26 44.99,57.26 45.16,57.42 45.16,58.41 U6.7 U6.8 | v36.32,66.29 36.32,67.06 35.94,67.44 34.3,67.44 | R2_PINH1.2 43.18,44.95 39.61,41.38 R7.2 17.79,39.73 11.83,39.73 11.03,40.53 R13.2 9.73,42.84 9.73,48.02 U2.2 8.8,48.94 8.8,63.07 7.27,64.6 7.27,66.41 5.71,67.97 v5.71,68.83
  Bottom 0.3: v35.81,99.57 36.58,98.81 v41.15,98.81 41.39,98.57 41.5,98.57 41.52,98.55 41.52,80.73 40.05,79.27 41.56,79.27 | v123.44,33.02 123.44,16.26 v123.95,15.75 | v104.17,54.25 99.47,58.95 92.02,58.95 91.98,58.91 | 91.98,58.91 93.35,57.54 93.35,51.19 v91.19,49.02 | 91.98,58.91 91.01,59.88 v91.01,60.45 72.19,79.27 41.56,79.27 | v5.71,68.83 5.71,72.64 4.95,73.41 v4.06,73.41 | v90.17,48.01 90.17,46.61 103.63,33.15 103.63,26.42 101.6,24.38 v92.84,24.38 | v36.32,66.29 32.64,62.61 v32.64,59.69 36.31,59.69 37.61,60.99 37.61,61.12 41.15,64.65 41.15,78.85 41.56,79.27
32KHZ  (via drill 0.35)
  Top 0.15: U5.1 87.63,58.29 87.25,57.91 62.87,57.91 61.85,56.9 56.26,56.9 56.13,56.77 v56.13,56.58 | v49.78,48.26 49.77,48.27 43.31,48.27 43.19,48.4 R2_PINH1.1 37.32,48.27 v37.08,48.51 | U2.9 18.23,49.1 19.3,50.16 v21.6,50.16 | v23.56,50.11 23.62,50.16 v25.65,50.16
  Bottom 0.15: v49.78,48.26 55.75,48.26 57.15,49.66 57.15,51.31 56.13,52.32 v56.13,56.58 | v21.6,50.16 23.62,50.16 v23.56,50.11 | v25.65,50.16 35.18,50.16 36.83,48.51 v37.08,48.51
DN
  Top 0.15: 162.01,53.55 162.81,53.55 163.58,53.55 J1.B7 | 162.01,53.55 145.5,53.55 D1.4 | J1.A7 163.01,54.55 162.01,53.55
DP
  Top 0.15: J1.A6 164.46,54.05 164.78,54.38 164.78,54.73 164.46,55.05 J1.B6 146.4,55.05 145.9,55.56 D1.6
EPD_3V3  (via drill 0.35)
  Top 0.3: C5_USB3.1 81.94,18.74 81.94,18.21 | 81.94,14.61 J3.15 | v78.61,20.57 78.61,20.95 78.99,21.34 79.88,21.34 80.54,22 EPD_C5.1 83.21,24.89 89.53,24.89 v90.3,25.65 | v91.19,26.54 91.19,27.05 87.76,30.48 TP17.TP 87.5,31.5 87.63,31.62 L1.2 85.85,33.91 83.44,36.32 83.44,38.73 84.33,39.62 v84.45,39.62 | v47.75,69.6 47.18,70.17 Q3.2 | J3.16 81.49,14.61 81.94,14.61 | 81.94,18.21 81.94,17.49 | 81.94,17.49 | 81.94,17.49 81.94,17.05 | 81.94,17.05 | 81.94,17.05 81.94,14.61 | v80.77,17.78 81.17,17.78 81.19,17.8 81.53,17.8 81.94,18.21
  Bottom 0.3: v80.77,17.78 79.5,17.78 78.61,18.67 v78.61,20.57 | v90.3,25.65 v91.19,26.54 | v84.45,39.62 87.63,42.8 87.63,44.07 84.84,46.86 70.48,46.86 v47.75,69.6
EPD_3V3_C  (via drill 0.35)
  Top 0.3: TP13.TP 20.77,72.18 U2.18 20.95,65.72 20.95,64.39 21.34,64.01 28.45,64.01 v29.08,64.64 | Q3.1 45.72,67.36 45.72,66.42 44.96,65.66 34.66,65.66 R8.1 33.01,66.15 32.77,65.91 32,65.91 v30.73,64.64
  Bottom 0.3: v29.08,64.64 v30.73,64.64
EPD_BUSY  (via drill 0.35)
  Top 0.15: v47.24,24.77 60.58,24.77 v72.62,12.73 | v45.47,27.81 41.91,31.37 TP9.TP 41.78,36.96 v39.37,36.96 | U2.26 10.62,63.93 11.43,63.12 v12.7,63.12 | v13.4,60.58 13.72,60.58 v16.38,57.91 | J3.9 84.94,13.05 84.53,12.65 v84.29,12.65
  Bottom 0.15: v47.24,24.77 45.47,26.54 v45.47,27.81 | v12.7,63.12 13.02,62.8 13.02,60.96 v13.4,60.58 | v39.37,36.96 37.77,36.96 36.83,37.9 36.83,38.48 25.67,49.64 25.43,49.64 17.16,57.91 v16.38,57.91 | v84.29,12.65 72.69,12.65 v72.62,12.73
EPD_CS  (via drill 0.35)
  Top 0.15: 86.11,20.7 86.11,21.34 85.36,22.08 83.45,22.08 v82.8,22.73 84.44,22.73 R15.1 | J3.12 83.44,15.24 84.22,16.02 84.58,16.02 86.11,17.55 86.11,20.7 | 86.11,20.7 87.74,22.34 v90.74,22.34 | TP10.TP 65.41,32.85 70.4,32.85 72.52,30.73 v72.52,29.08 72.52,35.66 78.04,41.18 98.45,41.18 98.72,41.45 98.72,42.57 98.18,43.11 97.19,43.11 96.88,42.8 70.29,42.8 67.48,45.61 v67.48,46.38 | v94.61,21.21 96.33,21.21 97.02,21.9 97.02,22.68 96.84,22.86 D11.2 | v63.9,47.89 63.25,48.54 54.79,48.54 45.3,39.05 32.84,39.05 32.37,39.53 32.37,40.48 32.67,40.79 40.77,40.79 44.58,44.6 44.58,47.02 43.96,47.64 27.01,47.64 26.25,46.88 26,46.88 22.82,43.7 20.24,43.7 20.08,43.86 20.08,47.33 20.77,48.02 U2.11
  Bottom 0.15: v82.8,22.73 80.03,25.5 75.33,25.5 72.52,28.32 v72.52,29.08 | v94.61,21.21 94.3,21.53 91.55,21.53 v90.74,22.34 | v63.9,47.89 64.85,46.94 66.92,46.94 v67.48,46.38
EPD_DC  (via drill 0.35)
  Top 0.15: J3.11 83.97,14.52 83.97,13.98 83.26,13.28 74.53,13.28 61.75,26.06 25.94,26.06 | 25.94,26.06 25.93,26.06 TP11.TP | U2.5 13.19,48.37 13.19,45.29 13.75,44.73 v13.75,44.64 | v16.22,30.94 16.68,30.48 16.68,29.98 17.3,29.36 24.16,29.36 25.94,27.58 25.94,26.06
  Bottom 0.15: v13.75,44.64 16.24,42.15 16.24,30.96 v16.22,30.94
EPD_RST  (via drill 0.35)
  Top 0.15: 16.96,70.36 16.96,72.08 TP12.TP | 16.96,70.36 U2.21 | v18.67,69.47 17.78,70.36 16.96,70.36 | J3.10 84.44,13.65 83.64,12.85 73.63,12.85 v61.09,25.4
  Bottom 0.15: v61.09,25.4 40.66,45.83 40.55,45.83 18.67,67.71 v18.67,69.47
FLASH_CS
  Top 0.15: D10.2 20.97,44.46 22.1,45.59 22.05,45.65 U2.12 22.05,49.86 22.13,49.95 22.13,51.47 31,60.34 R14.1 35.46,60.34 36.87,61.74 39.14,61.74 U6.1
GDR  (via drill 0.35)
  Top 0.15: v92.96,16.89 92.96,15.46 R5.2 91.92,15.33 88.77,15.33 88.44,14.99 J3.2 | v77.34,26.8 76.71,27.43 76.71,29.54 Q2.1
  Bottom 0.15: v92.96,16.89 83.06,26.8 v77.34,26.8
GND  (via drill 0.35)
  Top 0.15: 155.5,18.65 U3.7 | U4.6 131.7,20.57 U4.9 131.95,19.81 | C1_BAT2.2 125.11,13.72 v126.24,13.72 | R5.1 92.28,13.57 90.76,12.05 J3.MP1 J3.MP2 | D4.1 94.54,23.52 93.88,22.86 D11.1 92.24,22.86 89.76,20.37 EPD_C1.2 | J2.P6 7.12,92.59 8,93.47 v8,98.3 | v2.41,97.92 2.41,95.99 J2.G4 | v134.75,18.92 134.75,19.3 134.48,19.57 U4.1 | U2.29_2 U2.29_5 | 43.18,60.14 U6.9 | D12.1 59.05,47.73 60.54,46.24 D7.1 D9.1 | 65.31,38.09 R1_PWRUSB.1 | v20.83,47.12 D10.1 | v18.29,52.45 16.34,54.4 U2.29_7 | J1.MP4 J1.MP2 | J1.MP3 J1.MP1 | J1.B12 J1.A1 | J3.17 80.94,15.15 v81.28,15.49 | v84.71,15.49 85.22,15.49 85.44,15.28 J3.8 | C7.1 97.33,52.07 100.46,52.07 101.35,51.18 v101.35,50.04 | v99.06,47.75 98.3,46.99 C8.2 | v1.91,78.74 C5_USB2.2 2,74.94 v2.8,75.74 | v1.27,79.76 1.27,81.59 J2.G3 | U2.29_3 v11.18,56.9 | v9.02,64.52 8.07,65.46 U2.28 7.7,66.28 7.7,66.58 6.27,68.02 v6.27,68.47 | R2_BAT.1 138.91,51.27 v138.91,52.57 | v141.14,54.47 141.28,54.61 D1.2 | IC1.2 v114.46,52.07 | v112.03,50.84 112.85,50.02 C1_BAT1.2 | U2.1 7.89,48.59 v7.89,50.79 | v11.47,54.35 11.52,54.4 U2.29_1 | C5_USB3.2 82.19,21.04 v82.47,21.32 | v83.97,20.65 84.78,20.65 EPD_C6.2
  Bottom 0.15: v126.24,13.72 127,13.72 127.51,14.22 127.51,15.24 130.94,18.67 134.49,18.67 v134.75,18.92 | v8,98.3 7.11,99.19 3.68,99.19 v2.41,97.92 | v20.83,47.12 20.83,49.91 v18.29,52.45 | v84.71,15.49 v81.28,15.49 | v101.35,50.04 v99.06,47.75 | v1.91,78.74 1.27,79.38 v1.27,79.76 | v11.18,56.9 9.53,58.55 9.53,64.01 v9.02,64.52 | v138.91,52.57 140.81,54.47 v141.14,54.47 | v114.46,52.07 112.96,52.07 112.03,51.14 v112.03,50.84 | v7.89,50.79 11.45,54.35 v11.47,54.35 | v82.47,21.32 83.15,20.64 v83.97,20.64 v83.97,20.65 | v6.27,68.47 6.27,72.96 3.49,75.74 v2.8,75.74
  pour Top: 105.22,4.11 105.23,4.08 105.23,1.2 106.13,2.1 106.16,2.11 166.04,2.11 166.04,64.95 90.41,64.95 90.38,64.96 87.31,68.03 87.3,68.06 87.3,108.64 1.98,108.64 1.98,3.12 71.14,3.12 71.16,3.11 72.06,2.22 72.06,10.68 72.07,10.71 73.62,12.26 73.64,12.27 97.04,12.27 97.07,12.26
  pour Bottom: 1.78,1.65 70.99,1.65 71.37,1.27 71.37,8.26 74.29,11.18 102.74,11.18 105.03,8.89 105.03,1.4 168.53,1.4 168.78,1.65 168.78,62.61 165.48,65.91 89.28,65.91 88.64,66.55 88.64,108.97 88.01,109.6 2.67,109.6 2.29,109.98 2.29,2.16
GPIO8
  Top 0.15: U2.10 19.5,45.67 18.05,44.21 18.05,43.09 18.14,43 R7.1
I2C_PW  (via drill 0.35)
  Top 0.15: v117.7,21.21 117.86,21.21 121.68,17.39 149.33,17.39 C2.1 150.09,18.05 150.69,18.65 U3.2 154.46,18.65 155.25,19.45 U3.6 156.74,19.45 v157.1,19.09 | v43,76 42.87,75.87 42.87,74 R10.2 v38.48,73.03 | C1.1 22.34,74.95 22.13,74.73 22.13,71.73 22.05,71.65 U2.17 | C1.1 20.79,74.95 R9.2 | v23.11,73.28 22.57,73.82 C1.1 | U3.8 156.79,17.85 v157.1,18.16
  Bottom 0.15: v38.48,73.03 23.37,73.03 v23.11,73.28 | v157.1,18.16 v157.1,19.09 | v117.7,21.21 90.7,48.21 90.7,48.23 62.93,76 v43,76
INT_RTC  (via drill 0.35)
  Top 0.15: U5.3 85.09,64.14 v84.58,64.64 | v71.37,70.23 63.75,70.23 61.58,68.06 R1_PINH1.1 52.45,56.91 v52.45,56.89 | TP15.TP 52.2,51.56 v52.2,53.79 51.76,54.23 49.66,54.23 48.01,52.58 v48.01,50.29 | v31.11,42.16 39.37,42.16 v42.42,45.21 | U2.8 17.51,47.86 17.51,47.53 18.43,46.61 v18.67,46.61
  Bottom 0.15: v84.58,64.64 78.99,70.23 v71.37,70.23 | v52.45,56.89 52.2,56.64 v52.2,53.79 | v18.67,46.61 19.56,45.72 19.56,43.05 20.45,42.16 v31.11,42.16 | v42.42,45.21 46.86,45.21 48.01,46.35 v48.01,50.29
IO/BOOT  (via drill 0.35)
  Top 0.15: COND_BOOT.1 28.69,110.05 28.3,109.66 BOOT_BUTTON.3 BOOT_BUTTON.4 22.2,109.66 21.11,108.56 R_BOOT.1 16.87,108.56 16.13,107.82 16.13,106.05 v16.64,105.54 | v24.77,74.42 24.77,66.08 U2.15
  Bottom 0.15: v16.64,105.54 24.77,97.41 v24.77,74.42
IO/CHANGE
  Top 0.15: R_CHANGE.1 68.48,107.24 66.06,109.66 CHANGE_BUTTON.3 CHANGE_BUTTON.4 60.59,109.66 58.53,107.6 | 58.53,107.6 COND_CHANGE.1 | 58.53,107.6 55.67,110.46 46.33,110.46 40.58,104.71 40.58,97.86 14.43,71.71 U2.23
MISO  (via drill 0.35)
  Top 0.15: R11.1 6.37,102.89 TP6.TP 6.84,102.38 6.84,94.32 6.22,93.69 J2.P7 5.33,93.69 5.22,93.69 3.22,91.69 3.22,80.96 1.13,78.87 1.13,73.08 4.49,69.72 5.84,69.72 9.35,66.22 9.35,66.2 9.35,65.91 | U2.27 9.35,65.91 | v37.08,61.21 37.47,60.83 38.78,60.83 U6.2 40.3,59.31 40.51,59.31 40.77,59.05 v40.77,58.67 | v9.4,68.58 9.4,65.97 9.35,65.91 | v61.09,44.45 62.87,44.45 v63.37,44.96 | v63.7,47.19 63.15,47.74 D7.2
  Bottom 0.15: v37.08,61.21 37.08,67.82 34.8,70.1 9.78,70.1 9.4,69.72 v9.4,68.58 | v40.77,58.67 48.64,50.8 48.64,47.24 49.66,46.23 51.56,46.23 53.98,43.81 60.2,43.81 60.83,44.45 v61.09,44.45 | v63.37,44.96 63.37,46.48 63.7,46.81 v63.7,47.19
MOSI  (via drill 0.35)
  Top 0.15: R12.1 12.7,91.95 10.04,89.29 6.63,89.29 | 6.63,89.29 15.84,80.08 TP7.TP 15.84,76.3 13.84,74.3 v13.84,67.18 | 6.63,89.29 J2.P3 | v16.38,45.72 16.89,46.23 16.89,46.74 15.88,47.75 U2.7 | J3.14 82.42,14.54 82.42,14.1 82.11,13.78 75.25,13.78 69.6,19.43 69.6,26.58 71.63,28.62 v71.63,28.83 | v84.33,45.47 83.57,46.23 83.06,46.23 82.67,45.84 D8.2 75.04,45.84 v68.26,52.62 | v61.98,56.13 61.89,56.05 52.54,56.05 50.79,57.79 U6.5
  Bottom 0.15: v71.63,28.83 71.63,37.21 77.6,43.18 83.57,43.18 84.58,44.2 84.58,45.21 v84.33,45.47 | v68.26,52.62 64.74,56.13 v61.98,56.13 47.88,70.23 47.5,70.23 47.2,69.93 47.2,67.94 61.66,53.48 61.66,24.82 61.08,24.24 31.7,24.24 16.91,39.03 16.91,45.19 v16.38,45.72 15.11,45.72 13.93,46.9 13.93,67.1 v13.84,67.18
N$1
  Top 0.15: D2.1 136.94,46.34 136.75,46.15 136.64,46.15 136.86,46.37 136.86,46.53 135.82,47.58 134.48,47.58 133.03,46.13 131.69,46.13 | 131.69,46.13 129.78,48.04 129.78,49.58 125.76,53.6 117.67,53.6 116.17,52.09 116.17,51.63 115.66,51.13 115.14,51.13 IC1.3 114.16,51.12 113.96,51.32 C1_BAT1.1 113.67,52.55 114.13,53.02 114.98,53.02 | 131.69,46.13 131.22,45.66 131.21,45.66 131.21,43.63 Q1.2
  Top 0.152: 114.98,53.02 IC1.1
N$2
  Top 0.15: J3.24 76.41,14.55 72.01,18.95 EPD_C12.1
N$3  (via drill 0.35)
  Top 0.15: U1.1 132.08,52.42 v132.08,52.83 | v134.62,61.72 132.83,63.52 R1_BAT.2
  Bottom 0.15: v132.08,52.83 132.08,56.9 134.62,59.44 v134.62,61.72
N$4
  Top 0.15: J1.B5 160.95,56.05 160.12,56.88 R2-USB2.1
N$5
  Top 0.15: J1.A5 160.53,53.05 160.12,52.64 R2-USB1.2
N$6
  Top 0.15: C5_USB4.1 92.73,37.5 97.84,32.38 D3.1 98.02,28.85 D4.2
N$7
  Top 0.15: R1_BAT.1 131.47,62.22 128.71,64.97 LED1.C
N$8
  Top 0.15: R2_BAT.2 131.16,48.9 U1.5
N$9
  Top 0.15: R_CAPACITOR.2 95.15,61.61 93.04,63.72 D6.1
N$10
  Top 0.15: EPD_C10.1 75.77,18.24 78.44,15.57 J3.22
N$11
  Top 0.15: C_DELAY.1 50.81,103.56 49.81,102.55 IC3.5
N$12
  Top 0.15: EPD_C7.1 80.93,18.98 79.94,17.99 J3.19
N$13
  Top 0.15: EPD_C8.1 79.44,18.82 J3.20
N$14  (via drill 0.35)
  Top 0.15: J3.18 80.44,16.3 v81.41,17.27 | EPD_C6.1 85.11,19.02 85.11,18.24 84.84,17.97 v84.84,17.27
  Bottom 0.15: v81.41,17.27 v84.84,17.27
N$23
  Top 0.15: EPD_C2.1 88.43,19.07 86.94,17.57 J3.5
N$24
  Top 0.15: EPD_C1.1 89.66,19 89.34,18.68 87.44,16.78 J3.4
PREVGH  (via drill 0.35)
  Top 0.15: J3.21 78.94,17.67 77.57,19.04 EPD_C9.1 76.85,19.04 76.58,19.3 76.58,21.97 v76.51,22.04 | v75.81,24.22 80.52,28.92 v80.52,31.75 | v80.52,33.66 D5.1
  Bottom 0.15: v76.51,22.04 75.31,23.24 75.31,23.71 v75.81,24.22 | v80.52,31.75 v80.52,33.66
PREVGL  (via drill 0.35)
  Top 0.15: 74.23,18.6 73.79,19.04 EPD_C11.1 | 74.23,18.6 74.23,21.39 78.23,25.4 88.77,25.4 v89.66,26.29 | v91.19,27.81 91.19,29.05 D3.2 | 74.23,18.6 77.6,15.23 77.7,15.23 77.94,14.99 J3.23
  Bottom 0.15: v89.66,26.29 v91.19,27.81
RESE  (via drill 0.35)
  Top 0.15: J3.3 87.94,15.35 91.24,18.65 91.24,19.8 91.8,20.36 R6.2 92.12,20.82 v91.01,20.82 | v91.06,30.23 v89.03,32.26 | v86.87,32.26 80.76,32.26 80.74,32.28 78.43,32.28 Q2.2
  Bottom 0.15: v86.87,32.26 v89.03,32.26 | v91.06,30.23 92.08,29.21 92.08,24.51 90.04,22.48 90.04,21.78 v91.01,20.82
RESE'  (via drill 0.35)
  Top 0.15: R6.1 96.22,20.4 98.04,22.23 98.04,23.88 96.52,25.4 v95.25,25.4 | SJ1.2 82.66,27.95 R4.1 88.74,27.95 91.3,25.4 v93.98,25.4
  Bottom 0.15: v95.25,25.4 v93.98,25.4
RESET  (via drill 0.35)
  Top 0.15: COND_RESET.1 53.24,109.2 52.78,109.66 RESET_BUTTON.3 RESET_BUTTON.4 46.97,109.66 46.17,108.86 46.17,103.09 46.71,102.55 IC3.1 42.81,102.55 R_RESET.1 41.67,102.38 v41.27,101.98 | U2.3 10.62,52.88 9.91,53.59 9.91,58.79 14.53,63.41 28.6,63.41 32.38,67.19 32.38,67.88 44.83,80.33 v44.83,95.89
  Bottom 0.15: v44.83,95.89 41.27,99.44 v41.27,101.98
RTC_RST  (via drill 0.35)
  Top 0.15: v33.15,64.9 56.77,64.9 64.14,72.26 71.63,72.26 77.47,66.42 81.15,66.42 v81.28,66.29 | v81.79,65.02 81.79,64.01 83.82,61.98 U5.4 | U2.16 23.86,65.36 23.86,65.03 24.02,64.87 25.15,64.87 25.68,65.41 v29.84,65.41
  Bottom 0.15: v29.84,65.41 31.88,65.41 32.38,64.9 v33.15,64.9 | v81.28,66.29 81.79,65.79 v81.79,65.02
RX
  Top 0.15: TP2.TP 12.92,66.13 U2.24
SCK  (via drill 0.35)
  Top 0.15: J2.P5 5.89,91.57 8.89,91.57 v9.4,91.06 | v9.14,78.74 6.6,76.2 TP8.TP 10.54,71.75 v10.54,67.69 | v10.54,58.67 10.54,54.36 14.48,50.42 14.48,48.45 U2.6 14.43,44.58 13.96,44.12 13.89,44.12 12.33,42.56 R13.1 13.6,40.26 v17.57,40.26 | v70.23,43.81 70.23,45.21 67.7,47.74 D9.2 65.41,47.76 63.84,49.31 51.62,49.31 50.29,50.64 v50.29,53.59 50.29,48.5 50.31,48.48 50.31,45.87 44.7,40.26 v32.89,40.26 | v49.4,58.93 47.2,58.93 U6.6 | J3.13 82.92,14.56 82.92,16.29 83.36,16.72 83.36,21.46 v83.35,21.47
  Bottom 0.15: v9.4,91.06 9.53,90.93 9.53,79.12 v9.14,78.74 | v10.54,67.69 v10.54,58.67 | v70.23,43.81 70.23,28.83 74.24,24.82 80,24.82 82.28,22.54 82.28,22.51 82.58,22.2 82.61,22.2 v83.35,21.47 | v50.29,53.59 50.29,58.17 49.53,58.93 v49.4,58.93 | v17.57,40.26 v32.89,40.26
SCL  (via drill 0.35)
  Top 0.15: U4.7 130.58,20.07 128.82,21.83 128.94,21.83 | v74.21,54.03 85.92,54.03 87.63,52.32 U5.16 88,50.22 99.14,50.22 99.22,50.3 99.66,50.3 128.12,21.85 128.93,21.85 128.94,21.83 | v60.2,65.79 57.78,63.37 31.11,63.37 29.34,61.59 v22.99,61.59 | v19.3,63.94 18.23,65.01 U2.20 | 128.94,21.83 130.42,21.83 131.96,23.38 149.72,23.38 U3.4 154.43,21.83 162.95,21.83 164.08,20.7 J4.4
  Bottom 0.15: v74.21,54.03 62.46,65.79 v60.2,65.79 | v22.99,61.59 20.7,63.88 19.3,63.88 v19.3,63.94
SDA  (via drill 0.35)
  Top 0.15: U4.8 130.91,19.51 130.81,19.51 | 130.81,19.51 128.02,19.51 102.21,45.31 90.63,45.31 89.94,46 | U2.19 19.5,75.19 20.63,76.31 R9.1 23.16,78.74 v41.78,78.74 | v45.34,76.9 45.34,75.17 43.25,73.08 | 43.25,73.08 R10.1 | 89.94,46 86.84,46 84.2,48.64 76.46,48.64 v71.57,53.53 | v47.12,73.03 43.31,73.03 43.25,73.08 | 89.94,46 89.33,46.61 89.21,46.61 86.36,49.46 U5.15 | 130.81,19.51 131.92,18.39 148.06,18.39 149.12,19.45 U3.3 153.83,19.45 155.18,20.8 162.99,20.8 164.08,19.7 J4.3
  Bottom 0.15: v41.78,78.74 44.2,78.74 45.34,77.6 v45.34,76.9 | v71.57,53.53 52.08,73.03 v47.12,73.03
SRC
  Top 0.15: C5_USB4.2 87.78,38.33 L1.1 85.96,40.15 78.51,40.15 77.02,38.66 D5.2 77.02,33.62 Q2.3
SS_SD  (via drill 0.35)
  Top 0.15: J2.P2 6.99,87.42 v6.99,79.76 | v11.56,45.72 11.56,48.07 U2.4 | v56.77,44.58 57.39,44.58 D12.2 58.15,46.24 57.15,47.24 v57.15,47.97 | v47.37,47.37 v49.66,47.37 | v18.03,45.09 v15.75,45.09 | v61.09,59.56 60.59,59.07 R16.1 | v40.77,46.35 26.08,46.35 23,43.27 18.61,43.27 v18.58,43.31 | v60.33,51.18 63.09,53.94 68.83,53.94 v69.47,53.3
  Bottom 0.15: v6.99,79.76 6.99,45.47 7.75,44.7 10.41,44.7 11.43,45.72 v11.56,45.72 11.94,46.1 13.04,46.1 14.05,45.09 v15.75,45.09 | v56.77,44.58 53.98,47.37 v49.66,47.37 | v47.37,47.37 46.35,46.35 v40.77,46.35 | v18.58,43.31 18.58,44.54 v18.03,45.09 | v57.15,47.97 60.33,51.15 v60.33,51.18 | v69.47,53.3 70.07,52.7 71.2,52.7 64.34,59.56 v61.09,59.56
TX
  Top 0.15: TP1.TP 11.88,74.35 U2.25
USB_D+
  Top 0.15: D1.1 142.78,55.45 31.69,55.45 25.87,49.64 25.82,49.64 U2.14
USB_D-
  Top 0.15: D1.3 141.87,52.63 140.5,52.63 138.35,54.78 32.88,54.78 25.23,47.14 23.76,47.14 23.32,47.58 | 23.32,47.58 23.02,47.88 23.32,48.18 | U2.13 23.32,48.18 | 23.32,47.58 23.32,48.18
VBAT  (via drill 0.35)
  Top 0.3: TP3.TP 141.08,21.45 C2_BAT.1 137.06,21.45 136.18,20.57 v135.89,20.57 U4.3 U4.2 | v133.15,45.41 133.15,44.42 Q1.3 | U1.3 129.62,51.07 129.62,50.75 130.3,50.07 130.3,48.31 131.43,47.19 131.43,47.14 v131.57,46.99
  Bottom 0.3: v131.57,46.99 v133.15,45.41 134.87,43.69 134.87,21.59 v135.89,20.57
VBUS  (via drill 0.35)
  Top 0.3: v125.98,51.31 128.43,48.87 U1.4 129.22,45.98 Q1.1 130.4,44.77 129.55,43.92 129.55,42.39 130.04,41.89 132.38,41.89 134.84,44.36 D2.2 134.84,46.3 135.52,45.63 141.04,45.63 PFMF.050.1.2 141.64,51.11 143.77,53.24 143.77,53.33 145.05,54.61 D1.5 | LED1.A 113.96,64.61 v117.09,61.47 107.71,61.47 104.76,58.52 C4_USB.1 104.76,57.29 v105.66,56.39 | TP14.TP 48.16,36.83 49.43,35.56 C1_BAT.1 49.55,35.58 C5_USB.1 58.82,35.58 62.62,39.38 R1_PWRUSB.2 | v97.79,42.42 97.16,41.78 69.6,41.78 67.18,39.37 R1_PWRUSB.2 | R1_PWRUSB.2
  Bottom 0.3: v125.98,51.31 122.94,54.36 122.94,57.66 119.13,61.47 v117.09,61.47 | v105.66,56.39 105.66,50.29 v97.79,42.42
VRTC  (via drill 0.35)
  Top 0.3: v99.44,49.77 v99.43,49.77 98.72,49.06 C7.2 96.52,47.26 C8.1 96.23,47.01 89.56,47.01 v89.43,47.14 | v96.77,56.39 95.25,57.91 R_CAPACITOR.1 | v87.88,47.12 85.09,49.91 U5.14
  Bottom 0.3: v99.44,49.77 99.44,53.72 v96.77,56.39 | v87.88,47.12 89.41,47.12 v89.43,47.14
VUSB
  Top 0.3: PFMF.050.1.1 157.45,46.23 162.98,51.76 J1.A4 J1.B9 164.3,52.05 165.42,53.18 165.42,55.43 164.3,56.55 J1.B4 J1.A9
(copper drawn outside any net)
  shapes: Bottom area x1, Top area x9